# Altium PCB PCB2.PcbDoc
Units mil, origin at the board's own origin, x right, y up, seen from the top; angles counter-clockwise.
Board outline 3100 x 1943 mil, 2 copper layers (Top Layer, Bottom Layer); 17 components, 10 nets, 41 pads, 0 vias.
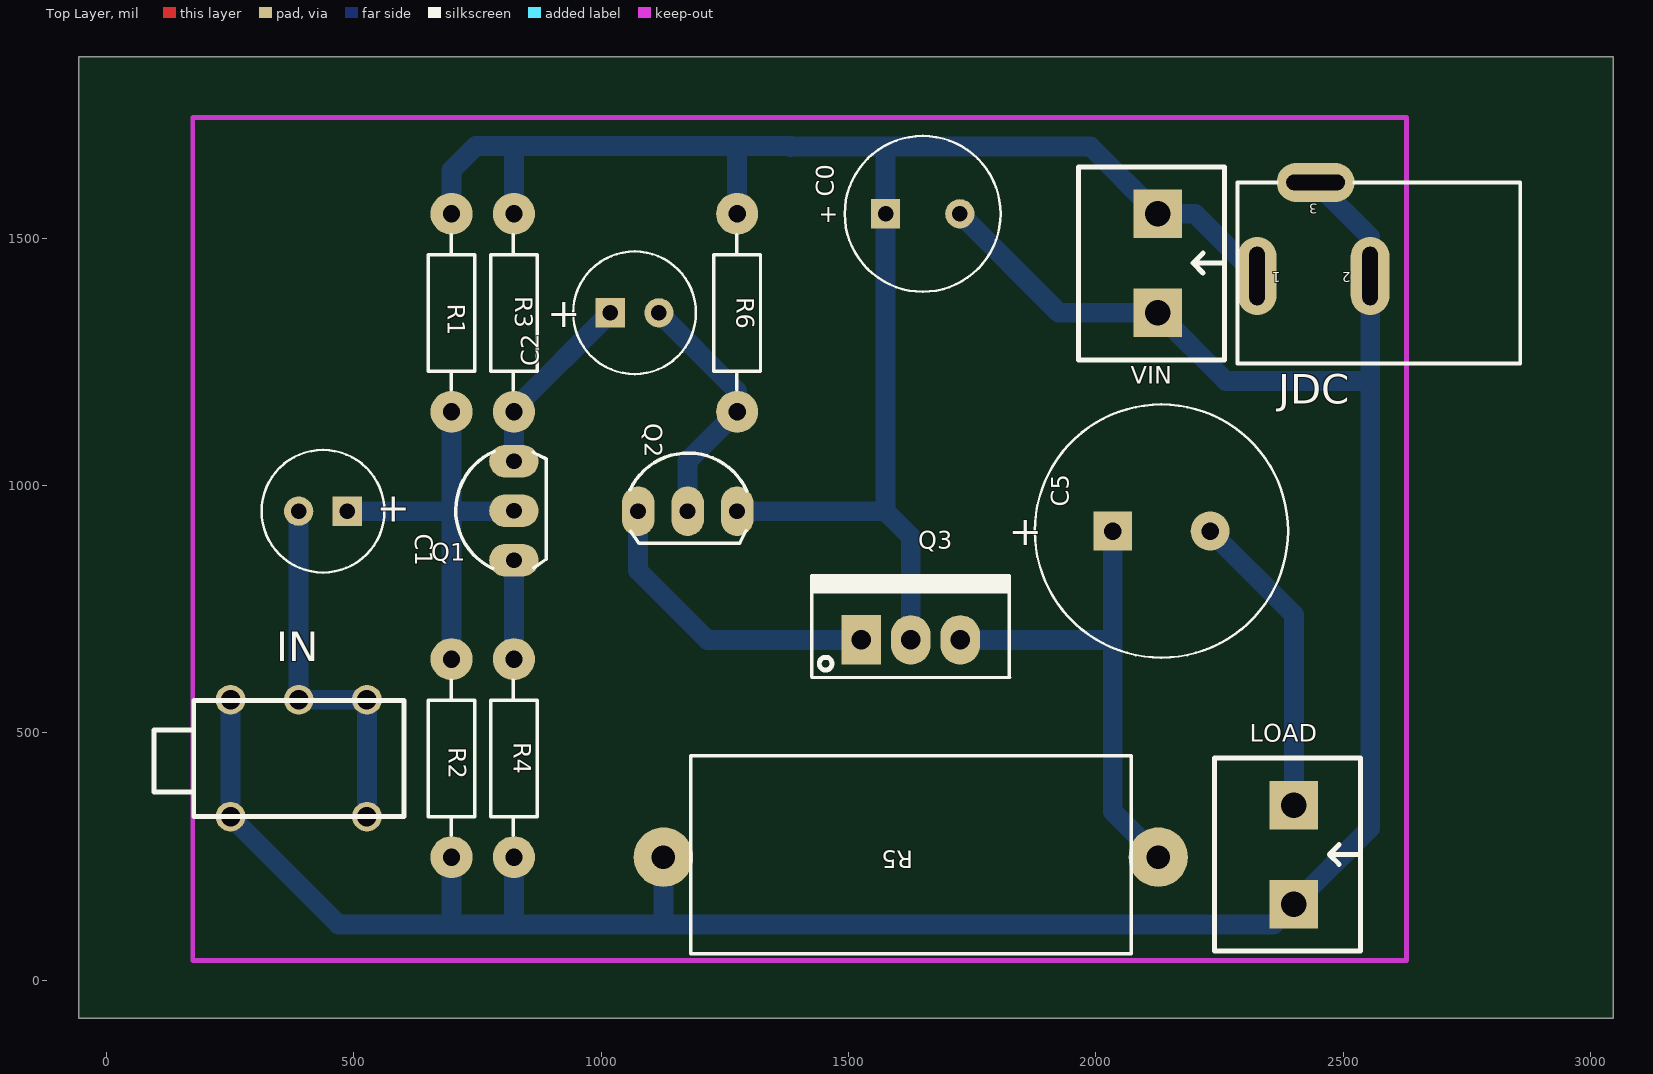
[diagram p0: Top Layer view]
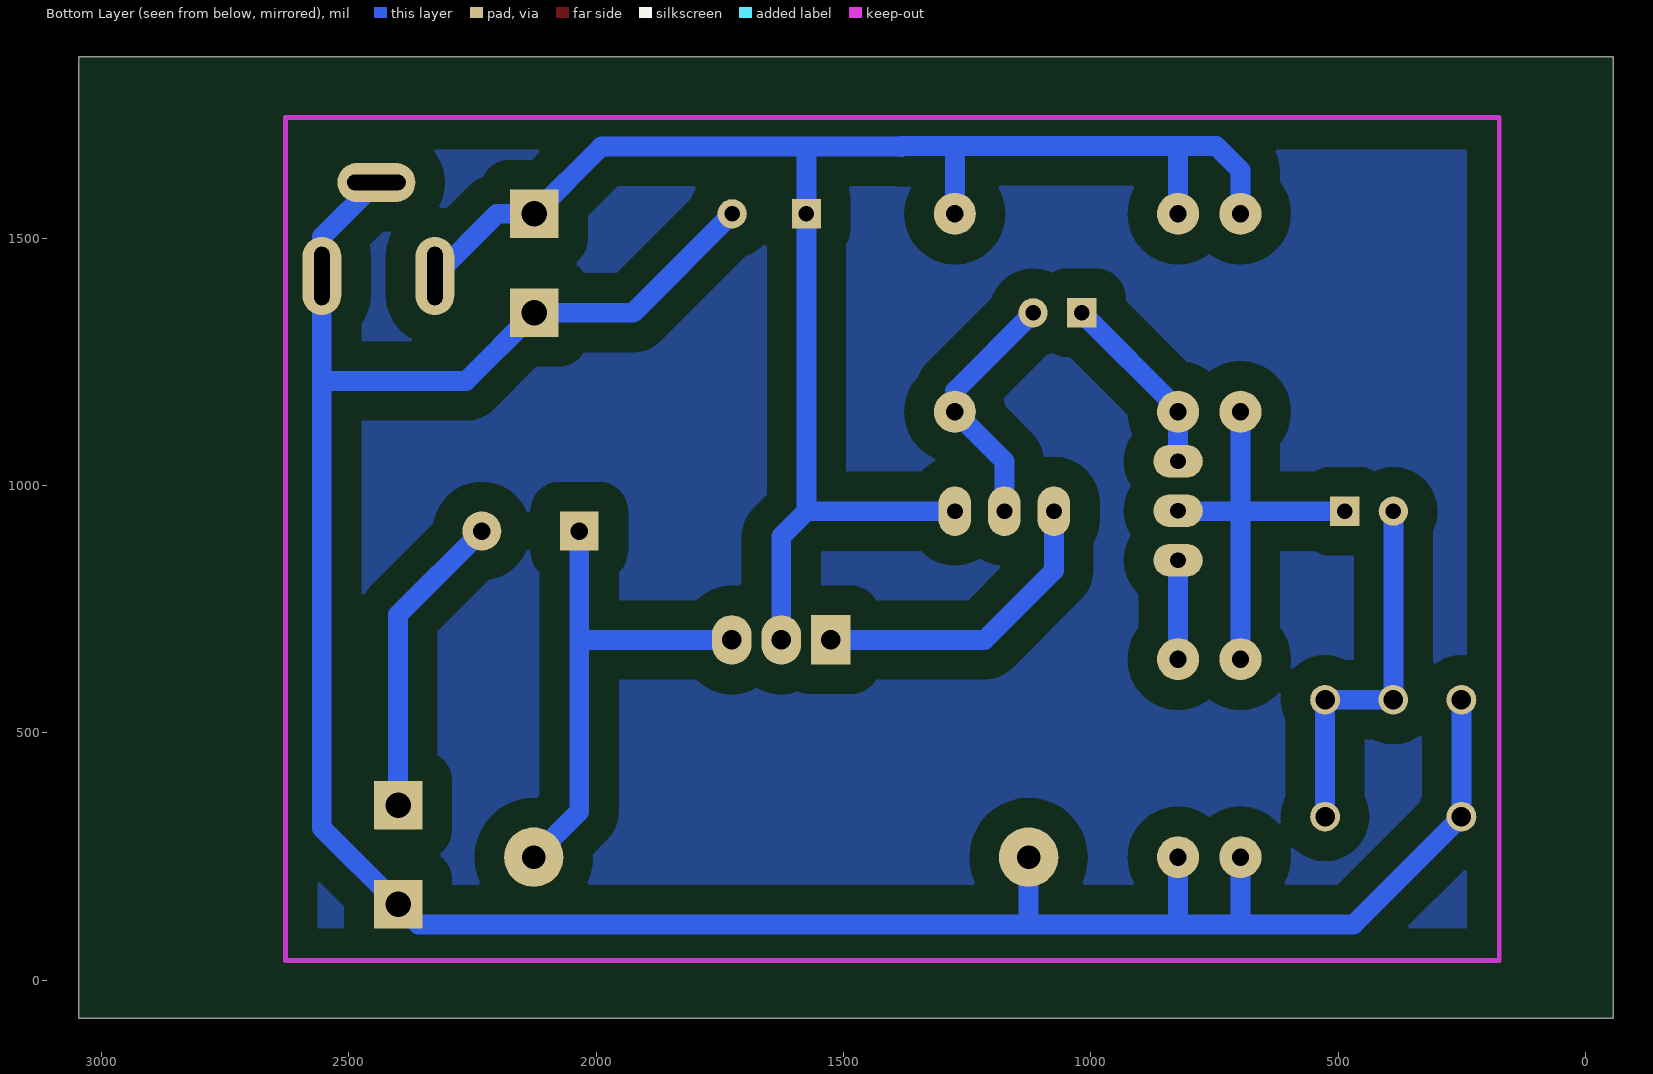
[diagram p1: Bottom Layer view, seen from below]
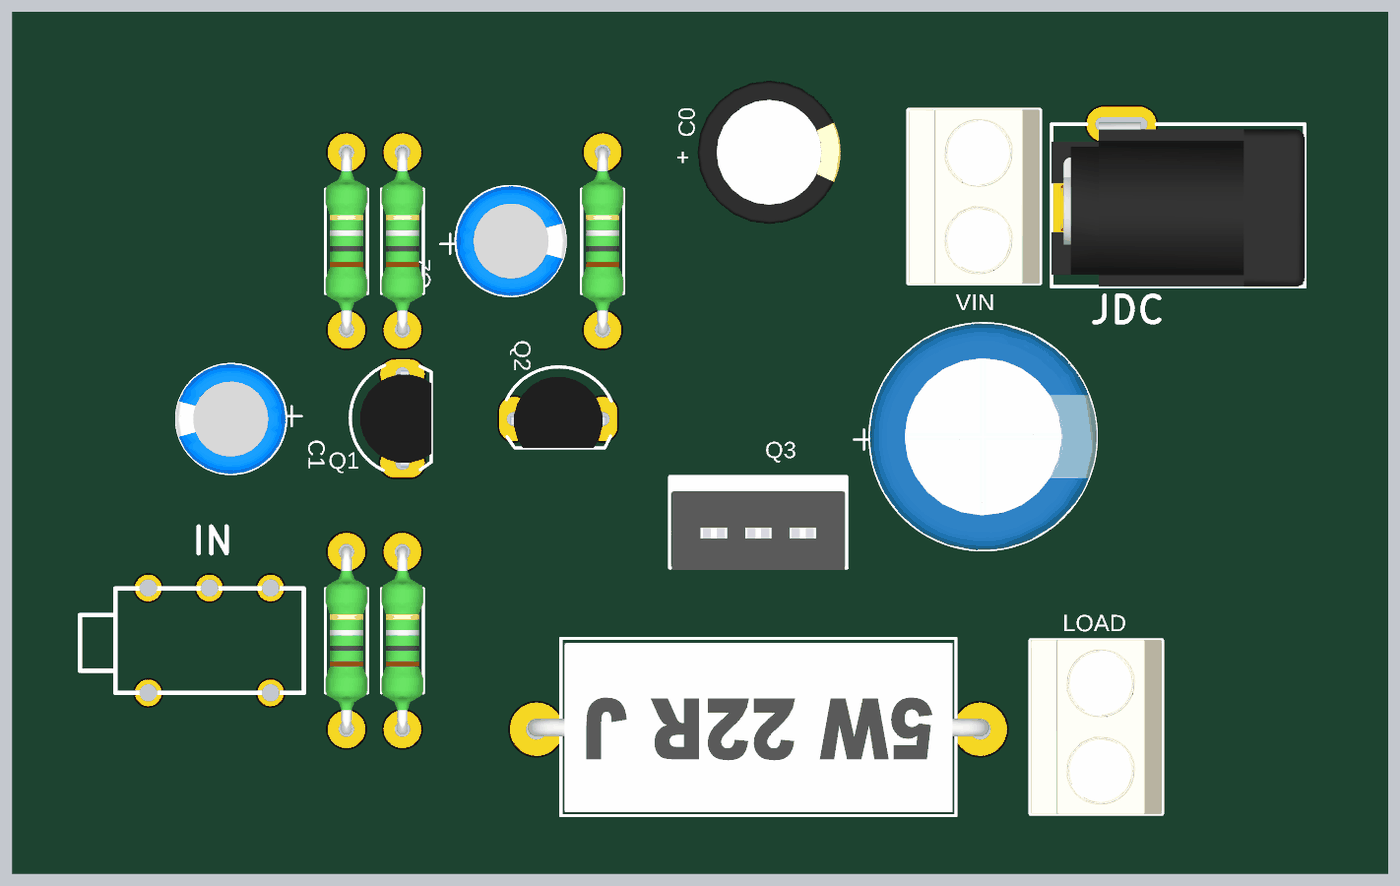
[diagram p2: 3D render of the assembled board from above, using the file's embedded part models]

## Layer stack, top to bottom
Top Solder: solder mask 0.4, Solder Resist, Dk 3.5
Top Layer: signal copper 1.4
Dielectric 1: dielectric 12.6, FR-4, Dk 4.8
Bottom Layer: signal copper 1.4
Bottom Solder: solder mask 0.4, Solder Resist, Dk 3.5

## Board outline
-55,-77 3045,-77 3045,1866 -55,1866

## Design rules (kind name [scope] priority, off if disabled: settings)
Clearance [All] p1: gap=10 ignorepadtopadclearanceinfootprint=FALSE
PolygonConnect [All] p1: connectstyle=Relief reliefconductorwidth=10 reliefentries=4 polygonreliefangle="90 Angle" airgapwidth=10
RoutingVias [All] p1: holewidth=28 width=50 viastyle="Through Hole" minholewidth=28 minwidth=50 maxholewidth=28 maxwidth=50
SolderMaskExpansion [All] p1: expansion=4
Width [All] p1: maxlimit=40 minlimit=10 preferedwidth=20
30 further rules are at their usual default settings.

## Components (designator, comment, footprint, x,y, rotation, side; value= is the part's Value field where it differs from the comment)
C0 "1000" CA-ALU-8 1650,1549 r0 top value=104
C1 "47" CA-ALU-6.3 438.21,948 r180 top value=104
C2 "1" CA-ALU-6.3 1067.79,1349 r0 top value=104
C5 "1000" CA-ALU-13BL 2132.43,908 r0 top value=104
IN "jack audio 3.5 cai" "Jack audio 3.5 PJ-313" 527,330.89 r180 top
JDC "Jac DC" DC5 2440,1423.38 r180 top
LOAD "KF2" KF2-5.08 2400,254 r270 top
Q1 "2N222" TO92-123 824,949 r90 top value=C1815
Q2 "2N222" TO92-123 1175,948 r0 top value=C1815
Q3 "TIP41C" TO220-123 1525.89,688 r0 top
R1 "220K" RES-1/4W 693,1334 r270 top
R2 "18K" RES-1/4W 693,434 r270 top
R3 "12k" RES-1/4W 819,1334 r270 top
R4 "750" RES-1/4W 819,434 r270 top
R5 "20" RES-5W 1596,259 r180 top
R6 "330K" RES-1/4W 1270,1334 r270 top
VIN "KF2" KF2-5.08 2125,1449 r270 top

## Footprints (in the part's own frame and the unit in brackets; to place one, negate y for a bottom-side part, rotate by r counter-clockwise, add the part's x,y. Pads: shape width x height; smd on the part's side, far side on the other; paste and mask are expansions set on the pad)
CA-ALU-6.3 [mm] "Polarized capacitors, Aluminum Electrolytic Capacitors, 2-Leads, Body 6.3x15x2.5x0.5"
  rect 1.5x1.5 hole 0.8: 1(-1.25,0)
  round 1.5 hole 0.8: 2(1.25,0)
  silkscreen extent -3.15,-3.15 3.15,3.15, body extent -3.12,-3.15 3.18,3.15, height 11
CA-ALU-8 [mm] "Polarized capacitors, Aluminum Electrolytic Capacitors, 2-Leads, Body 8x16x3.5x0.5"
  rect 1.5x1.5 hole 0.8: 1(-1.905,0)
  round 1.5 hole 0.8: 2(1.905,0)
  silkscreen extent -4,-4 4,4, body extent -4.1,-4.1 4.1,4.1, height 14.4
CA-ALU-13BL [mm] "Polarized capacitors, Aluminum Electrolytic Capacitors, 2-Leads, Body 13x35x5x0.6"
  rect 2x2 hole 0.9: 1(-2.5,0)
  round 2 hole 0.9: 2(2.5,0)
  silkscreen extent -6.5,-6.5 6.5,6.5, body extent -6.5,-6.5 6.5,6.5, height 25
DC5 [mm] "WR-DC_DC Power Jack_Right Angled_THT Center Pin ?2.0_Plug ID ?2.05_Plug OD ?5.5"
  oval 2x4 hole 0.8 slot 3 at 90 deg: 1(2.9,0) 2(-2.9,0)
  oval 4x2 hole 0.8 slot 3 at 0 deg: 3(-0.1,-4.8)
  silkscreen extent -10.6,-4.8 3.9,4.5, body extent -10.6,-4.9 3.9,4.5, height 10.7
"Jack audio 3.5 PJ-313" [mm]
  round 1.524 hole 1: 1(0,0) 1(0,-6) 2(3.5,-6) 3(7,0) 3(7,-6)
  silkscreen extent -1.91,-5.97 10.92,0
KF2-5.08 [mm]
  rect 2.5x2.5 hole 1.3: 1(-2.54,0) 2(2.54,0)
  silkscreen extent -4.95,-4.08 4.95,3.43, body extent -5,-4.07 5,3.43, height 10
RES-1/4W [mil]
  round 85 hole 35: 1(-215,5) 2(185,5)
  silkscreen extent -173,-42 141,52, body extent -227,-42 197,52, height 95
RES-5W [mil] "R5W , 2 pin, 400 x 950mil"
  round 120 hole 47.24: 1(-530,10) 2(470,10)
  silkscreen extent -475,-195 415,205, body extent -550,-185 490,197, height 363
TO92-123 [mil] "TO-92"
  oval 66x100 hole 32: 1(-100,0) 2(0,0) 3(100,0)
  silkscreen extent -117,-65 120,118, body extent -109,-66 109,95, height 245
TO220-123 [mil] "TO-220 - 1-2-3"
  rect 80x100 hole 39: 1(0,0)
  oval 80x100 hole 39: 2(100,0) 3(200,0)
  silkscreen extent -100,-76 300,130, body extent -95,-80 295,97, height 323

## Part data
C0 C1 C2 C5: library part CN-ALU-DIP, "Capacitor (Semiconductor SIM Model)", LatestRevisionDate=17-Jul-2002, LatestRevisionNote="Re-released for DXP Platform.", PackageReference=C1206, Publisher="Altium Limited"
JDC: library part DCIN, "Jac DC input"
LOAD VIN: Manufacturer="Würth Elektronik eiSos GmbH", partNo=691103110002, ComponentLink1 Description=Manufacturer, ComponentLink1URL=http://www.we-online.com, ComponentLink2 Description=Datasheet, ComponentLink2URL=http://katalog.we-online.de/em/datasheet/6911031100xx.pdf, Created by="Karrer Zheng", Created Date="29 October 2013", NoPins=2
Q1 Q2: "NPN 600mW, ECB", =C2383
Q3: "NPN 2W, BCE", =H1061
R1 R2 R3 R4 R5 R6: library part Res, "Res", Manufacturer="Generic Components", Class=Passive, Published=08/06/2000, Publisher="Altium Hobart Technology Centre", SubClass=R

## Nets (pads, with @x,y where several pads share a name; then routed paths per layer and width w, separated by ;. In a path a pad name is that pad's centre, name@x,y a point inside that pad or via, vN(x,y) a via of type N, cw(c..) or ccw(c..) an arc to the next point about the centre after c; other vN are vias at no path point)
GND: C0.2 IN.3 JDC.2 JDC.3 LOAD.2 R2.2 R4.2 R5.2 VIN.2 | length 5442.1
  Bottom Layer w40: IN.3@251.41,567.11 251.41,330.89 469.3,113 692,113 ; R2.2 698,119 692,113 ; R4.2 824,116 827,113 ; R5.2 1126,116 1123,113 ; C0.2 1925,1349 VIN.2 2263,1211 2554.17,1211 ; JDC.3 2554.17,1502.12 JDC.2 2554.17,1211 ; 692,113 827,113 ; 827,113 1123,113 ; 1123,113 2359,113 LOAD.2 2554.17,308.17 2554.17,1211
NetC1_1: C1.1 Q1.2 R1.2 R2.1 | length 837
  Bottom Layer w40: C1.1 698,948 ; R2.1 698,948 ; R1.2 698,948 ; Q1.2 823,948 698,948
NetC1_2: C1.2 IN.1 IN.2 | length 755
  Bottom Layer w40: C1.2 389,567.32 IN.2 527,567.11 IN.1@527,330.89
NetC2_1: C2.1 Q1.3 R3.2 | length 380.6
  Bottom Layer w40: Q1.3 R3.2 824,1154.43 C2.1
NetC2_2: C2.2 Q2.2 R6.2 | length 507.9
  Bottom Layer w40: C2.2 1275,1191 R6.2 1175,1049 Q2.2
NetC5_1: C5.1 Q3.3 R5.1 | length 1005.2
  Bottom Layer w40: Q3.3 2034,688 ; C5.1 2034,688 ; R5.1 2034,341 2034,688
NetC5_2: C5.2 LOAD.1 | length 624.1
  Bottom Layer w40: C5.2 2400,738.85 LOAD.1
NetQ1_1: Q1.1 R4.1 | length 200
  Bottom Layer w40: R4.1 Q1.1
NetQ2_1: Q2.1 Q3.1 | length 628.9
  Bottom Layer w40: Q2.1 1075,828 1215,688 Q3.1
VCC: C0.1 JDC.1 Q2.3 Q3.2 R1.1 R3.1 R6.1 VIN.1 | length 3448.3
  Bottom Layer w40: R1.1 698,1637 747,1686 828,1686 ; R3.1 824,1682 828,1686 ; Q2.3 1575,948 ; R6.1 1275,1675 1286,1686 ; 1383,1684 1384,1685 ; Q3.2 1625.89,897.11 1575,948 ; JDC.1 2200.2,1549 VIN.1 1989,1685 1579,1685 ; 828,1686 1286,1686 ; 1286,1686 1385,1686 1384,1685 ; 1384,1685 1579,1685 ; 1575,948 C0.1 1575,1681 1579,1685

## Polygon pours and split planes (outlines as drawn)
no net on Bottom Layer "Bottom Layer-No Net" (solid, pour order 0): 175,40 175,1744 2616,1744 2628,1732 2628,40

## Keep-outs
Keep-Out Layer:
  lines w10: 175,40 175,1744 2628,1744 2628,40 175,40

## Text inside footprints (layer, text, board x,y; h text height)
C0: Top Overlay "+" at 1440.35,1519.98 h59.06
C1: Top Overlay "+" at 614.39,977.02 h59.06 r180
C2: Top Overlay "+" at 891.61,1319.98 h59.06
C5: Top Overlay "+" at 1824.35,878.98 h59.06
JDC: Top Overlay "1" at 2373.07,1431.25 h19.68 r180; Top Overlay "2" at 2514.8,1431.25 h19.68 r180; Top Overlay "3" at 2447.87,1569.05 h19.68 r180